# Altium PCB MolsonPCB.PcbDoc (part 7 of 9)
Units mil, origin at the board's own origin, x right, y up, seen from the top; angles counter-clockwise.
Board outline 8000 x 6000 mil, 14 copper layers (TopLayer (1 oz), InternalPlane1 (0.5 oz), InternalPlane2 (0.5 oz), MidLayer1 (0.5 oz), InternalPlane3 (0.5 oz), MidLayer2 (0.5 oz), InternalPlane4 (0.5 oz), InternalPlane5 (0.5 oz), MidLayer3 (0.5 oz), InternalPlane6 (0.5 oz), MidLayer4 (0.5 oz), InternalPlane7 (0.5 oz), InternalPlane8 (0.5 oz), BottomLayer (1 oz)), stack 86.2 mil thick; 657 components, 643 nets, 3094 pads, 1958 vias.
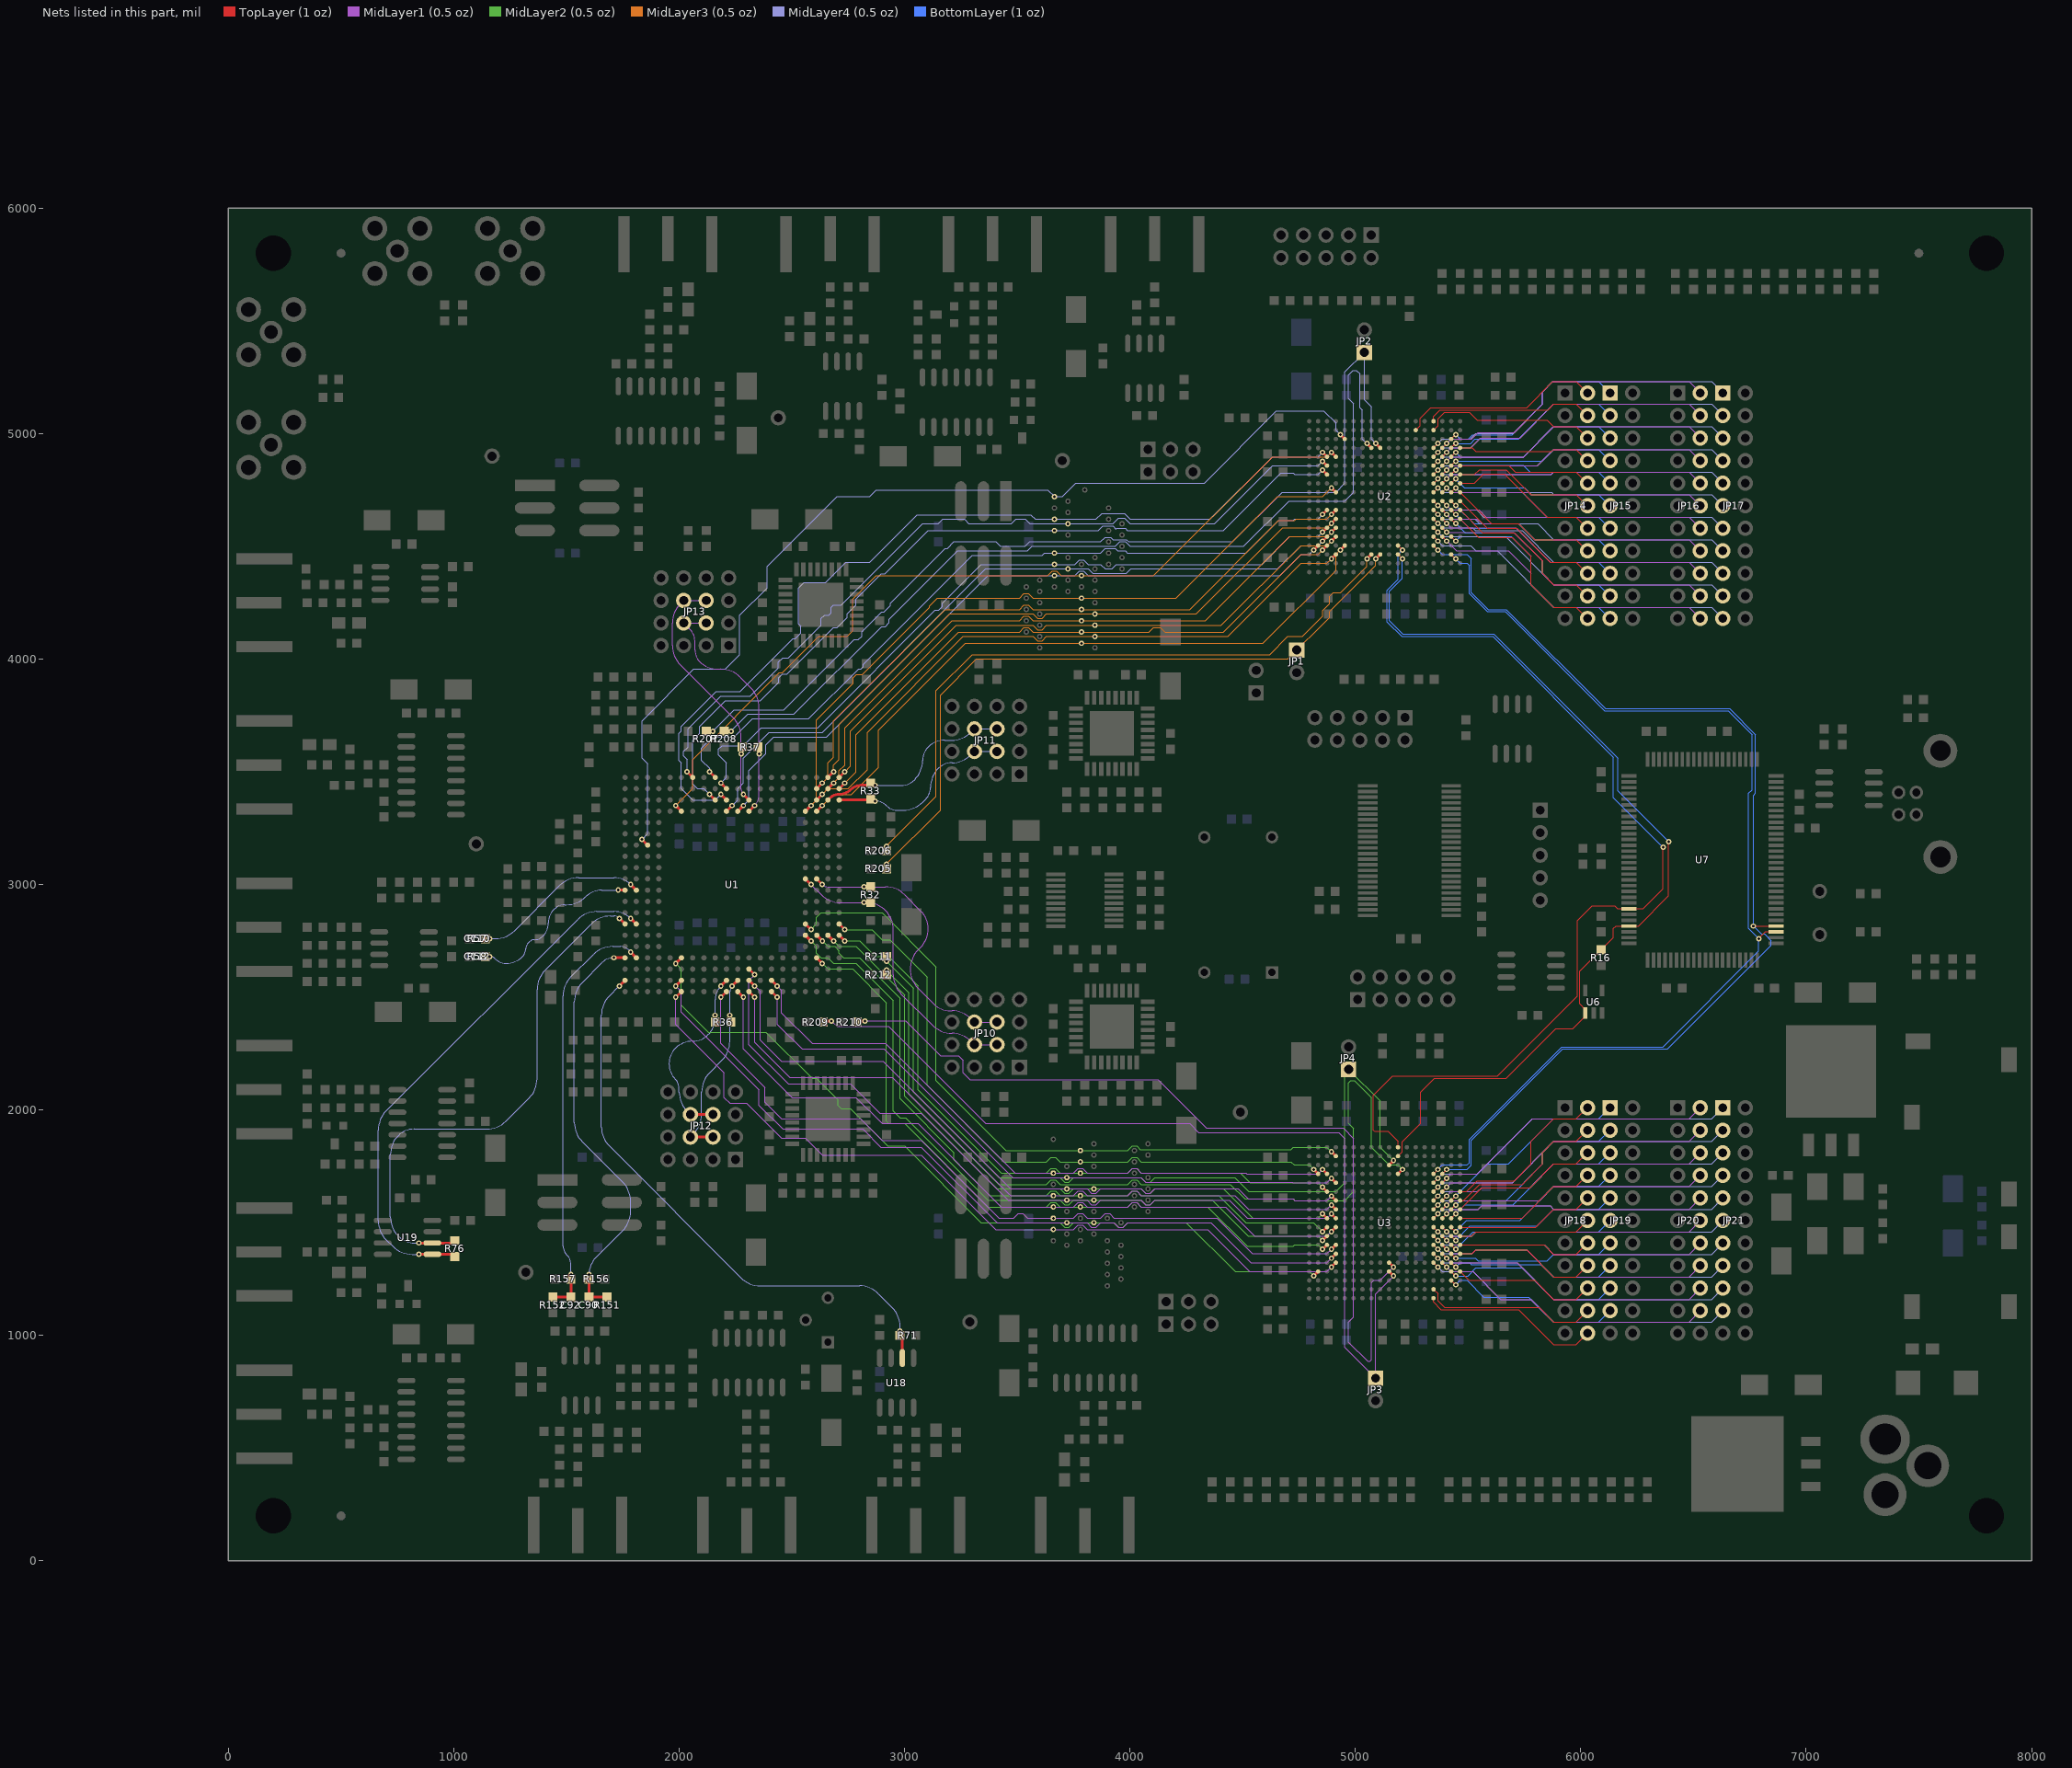
[diagram p19: the nets of this part, all layers, seen from the top]

## Via types
v1: diameter 24, hole 12, TopLayer (1 oz) to BottomLayer (1 oz), 1958 vias

## Nets (pads, with @x,y where several pads share a name; then routed paths per layer and width w, separated by ;. In a path a pad name is that pad's centre, name@x,y a point inside that pad or via, vN(x,y) a via of type N, cw(c..) or ccw(c..) an arc to the next point about the centre after c; other vN are vias at no path point) (continued)
OUTC1-: R71.1 U1.A2 U18.2 | length 2537.7
  TopLayer (1 oz) w12.34: v1(1735,2550) U1.A2@1760,2575 ; U18.2@2990,900 R71.1@2990,1000
  MidLayer4 (0.5 oz) w5.07: v1(1735,2550) 1690.36,2505.36 ccw(c1775.71,2420) 1655,2420 1655,1925 ccw(c1775.71,1925) 1690.36,1839.64 2274.64,1255.36 ccw(c2360,1340.71) 2360,1220 2800,1220 cw(c2800,1099.29) 2885.36,1184.64 2944.64,1125.36 cw(c2859.29,1040) 2980,1040 v1(2980,1020)
OUTC2+: C92.1 R152.1 R157.2 U1.B4 | length 1858
  TopLayer (1 oz) w12.34: R152.1@1440,1170 C92.1@1520,1170 R157.2@1520,1250 ; v1(1785,2700) U1.B4@1810,2675
  MidLayer4 (0.5 oz) w5.07: v1(1520,1270) 1520,1311.72 ccw(c1451.72,1311.72) 1500,1360 cw(c1536.21,1396.21) 1485,1396.21 1485,2505 cw(c1605.71,2505) 1520.36,2590.36 1619.64,2689.64 cw(c1705,2604.29) 1705,2725 1740,2725 cw(c1740,2676.72) 1774.14,2710.86 v1(1785,2700)
OUTC2-: C90.1 R151.2 R156.2 U1.A4 | length 1856.7
  TopLayer (1 oz) w12.34: R156.2@1600,1250 C90.1@1600,1170 R151.2@1680,1170 ; v1(1710,2675) U1.A4@1760,2675
  MidLayer4 (0.5 oz) w5.07: v1(1600,1270) cw(c1708.64,1270) 1631.82,1346.82 1749.64,1464.64 ccw(c1664.29,1550) 1785,1550 1785,1595 ccw(c1664.29,1595) 1749.64,1680.36 1570.36,1859.64 cw(c1655.71,1945) 1535,1945 1535,2480 cw(c1655.71,2480) 1570.36,2565.36 1658.79,2653.79 cw(c1710,2602.57) v1(1710,2675)
OUTD1+: R76.2 U1.B7 U19.1 | length 2405.1
  TopLayer (1 oz) w12.34: v1(845,1360) U19.1@905,1360 R76.2@1005,1360 ; v1(1785,2850) U1.B7@1810,2825
  MidLayer4 (0.5 oz) w5.07: v1(845,1360) 815,1360 cw(c815,1480.71) 729.64,1395.36 700.36,1424.64 cw(c785.71,1510) 665,1510 665,1910 cw(c785.71,1910) 700.36,1995.36 1549.64,2844.64 cw(c1635,2759.29) 1635,2880 1712.57,2880 cw(c1712.57,2777.57) v1(1785,2850)
OUTD1-: R76.1 U1.A7 U19.2 | length 2411.1
  TopLayer (1 oz) w12.34: v1(845,1410) U19.2@905,1410 R76.1@1005,1410 ; v1(1735,2850) U1.A7@1760,2825
  MidLayer4 (0.5 oz) w5.07: v1(845,1410) 826.92,1410 cw(c826.92,1511.21) 755.36,1439.64 754.36,1440.64 cw(c839.71,1526) 719,1526 719,1801 cw(c839.71,1801) 754.36,1886.36 cw(c823.51,1817.2) 823.51,1915 1146,1915 ccw(c1146,2035.71) 1231.36,1950.36 1334.64,2053.64 ccw(c1249.29,2139) 1370,2139 1370,2535 cw(c1490.71,2535) 1405.36,2620.36 1609.64,2824.64 cw(c1695,2739.29) 1695,2860 1710.86,2860 cw(c1710.86,2825.86) v1(1735,2850)
OUTD2+: C110.1 R57.2 U1.B10 | length 769.8
  TopLayer (1 oz) w12.34: v1(1785,3000) U1.B10@1810,2975
  MidLayer4 (0.5 oz) w5.07: v1(1160,2760) 1185,2760 ccw(c1185,2880.71) 1270.36,2795.36 1469.64,2994.64 cw(c1555,2909.29) 1555,3030 1712.57,3030 cw(c1712.57,2927.57) v1(1785,3000)
OUTD2-: C112.1 R58.2 U1.A10 | length 772.7
  TopLayer (1 oz) w12.34: v1(1730,2975) U1.A10@1760,2975
  MidLayer4 (0.5 oz) w5.07: v1(1160,2680) cw(c1160,2643.79) 1185.61,2669.39 ccw(c1232.43,2716.21) 1232.43,2650 ccw(c1232.43,2752.78) 1305.1,2680.1 ; 1305.13,2680.13 ccw(c1269.19,2716.04) 1320,2716.04 cw(c1353.69,2716.04) 1329.87,2739.87 1335.5,2745.5 cw(c1358.43,2722.57) 1358.43,2755 1358.48,2755 ccw(c1358.48,2806.94) 1395.21,2770.21 1395.25,2770.25 ccw(c1335.5,2830) 1420,2830 cw(c1504.5,2830) 1444.75,2889.75 cw(c1493.64,2840.86) 1493.64,2910 1500,2910 ccw(c1500,3030.71) 1585.36,2945.36 cw(c1656.92,2873.79) 1656.92,2975 v1(1730,2975)
PA7/*FLAGD/SLCS#: U2.L4 U3.H1 U7.74 | length 4486
  TopLayer (1 oz) w5: U3.H1@5189.06,1834.65 5189.06,1860.94 5145,1905 5085,1905 5080,1910 5080,2065 5165,2150 5630,2150 5985,2505 5985,2840 6050,2905 6150,2905 6162.52,2892.48 U7.74@6213.03,2892.48 6277.48,2892.48 6365,2980 v1(6365,3165) ; U2.L4@5189.06,4503.47 v1(5208.74,4483.78)
  BottomLayer (1 oz) w5: v1(5208.74,4483.78) 5189.06,4464.09 5189.06,4354.06 5140,4305 5140,4165 5205,4100 5610,4100 6145,3565 6145,3385 v1(6365,3165)
PRXCLKA: JP15.1 U2.U16 | length 879.2
  TopLayer (1 oz) w5: U2.U16@5425.27,4975.9 v1(5444.96,4995.59)
  BottomLayer (1 oz) w5: v1(5444.96,4995.59) 5464.65,4975.91 5500.91,4975.91 5520,4995 5695,4995 5830,5130 5830,5185 5875,5230 6080,5230 JP15.1@6130,5180
PRXCLKB: JP17.1 U2.R15 | length 1458
  TopLayer (1 oz) w5: U2.R15@5346.53,4936.53 v1(5366.22,4956.22)
  MidLayer4 (0.5 oz) w5: v1(5366.22,4956.22) 5385.91,4975.91 5510.91,4975.91 5535,5000 5700,5000 5830,5130 5830,5185 5875,5230 6580,5230 JP17.1@6630,5180
PRXCLKC: JP19.1 U3.B7 | length 875.2
  TopLayer (1 oz) w5: U3.B7@5425.27,1598.43 v1(5444.96,1618.11)
  BottomLayer (1 oz) w5: v1(5444.96,1618.11) 5586.85,1760 5680,1760 5880,1960 6080,1960 JP19.1@6130,2010
PRXCLKD: JP21.1 U3.D5 | length 1421.3
  TopLayer (1 oz) w5: U3.D5@5346.53,1677.16 v1(5366.22,1696.85)
  MidLayer4 (0.5 oz) w5: v1(5366.22,1696.85) 5385.91,1716.54 5541.54,1716.54 5785,1960 6580,1960 JP21.1@6630,2010
PRXDA0: JP15.3 U2.U15 | length 805.6
  TopLayer (1 oz) w5: U2.U15@5425.27,4936.53 v1(5444.96,4956.22)
  BottomLayer (1 oz) w5: v1(5444.96,4956.22) 5511.22,4956.22 5530,4975 5725,4975 5880,5130 6080,5130 JP15.3@6130,5080
PRXDA1: JP15.5 U2.U14 | length 798.6
  TopLayer (1 oz) w5: U2.U14@5425.27,4897.16 v1(5444.96,4916.85)
  BottomLayer (1 oz) w5: v1(5444.96,4916.85) 5466.81,4895 5745,4895 5880,5030 6080,5030 JP15.5@6130,4980
PRXDA2: JP15.7 U2.U13 | length 755.3
  TopLayer (1 oz) w5: U2.U13@5425.27,4857.8 v1(5444.96,4877.48)
  BottomLayer (1 oz) w5: v1(5444.96,4877.48) 5827.48,4877.48 5880,4930 6080,4930 JP15.7@6130,4880
PRXDA3: JP15.9 U2.U12 | length 755.1
  TopLayer (1 oz) w5: U2.U12@5425.27,4818.43 v1(5444.96,4838.11)
  BottomLayer (1 oz) w5: v1(5444.96,4838.11) 5466.85,4860 5745,4860 5775,4830 6080,4830 JP15.9@6130,4780
PRXDA4: JP15.11 U2.U11 | length 762.1
  TopLayer (1 oz) w5: U2.U11@5425.27,4779.06 v1(5444.96,4798.74)
  BottomLayer (1 oz) w5: v1(5444.96,4798.74) 5483.7,4760 5750,4760 5780,4730 6080,4730 JP15.11@6130,4680
PRXDA5: JP15.13 U2.U10 | length 787.2
  TopLayer (1 oz) w5: U2.U10@5425.27,4739.69 v1(5444.96,4759.37)
  BottomLayer (1 oz) w5: v1(5444.96,4759.37) 5464.33,4740 5740,4740 5850,4630 6080,4630 JP15.13@6130,4580
PRXDA6: JP15.15 U2.U9 | length 796
  TopLayer (1 oz) w5: U2.U9@5425.27,4700.31 v1(5444.96,4680.63)
  BottomLayer (1 oz) w5: v1(5444.96,4680.63) 5525.59,4600 5725,4600 5795,4530 6080,4530 JP15.15@6130,4480
PRXDA7: JP15.17 U2.U8 | length 821.1
  TopLayer (1 oz) w5: U2.U8@5425.27,4660.94 v1(5444.96,4641.26)
  BottomLayer (1 oz) w5: v1(5444.96,4641.26) 5506.22,4580 5715,4580 5865,4430 6080,4430 JP15.17@6130,4380
PRXDA8: JP15.19 U2.U7 | length 878.4
  TopLayer (1 oz) w5: U2.U7@5425.27,4621.57 v1(5444.96,4601.89)
  BottomLayer (1 oz) w5: v1(5444.96,4601.89) 5486.85,4560 5705,4560 5830,4435 5830,4380 5880,4330 6080,4330 JP15.19@6130,4280
PRXDA9: JP15.21 U2.U5 | length 944.5
  TopLayer (1 oz) w5: U2.U5@5425.27,4542.84 v1(5444.96,4523.15)
  BottomLayer (1 oz) w5: v1(5444.96,4523.15) 5464.65,4542.83 5692.17,4542.83 5780,4455 5780,4330 5880,4230 6080,4230 JP15.21@6130,4180
PRXDB0: JP17.3 U2.R14 | length 1400.6
  TopLayer (1 oz) w5: U2.R14@5346.53,4897.16 v1(5366.22,4916.85)
  MidLayer4 (0.5 oz) w5: v1(5366.22,4916.85) 5385.91,4936.54 5511.54,4936.54 5555,4980 5730,4980 5880,5130 6580,5130 JP17.3@6630,5080
PRXDB1: JP17.5 U2.R13 | length 1375.5
  TopLayer (1 oz) w5: U2.R13@5346.53,4857.8 v1(5366.22,4877.48)
  MidLayer4 (0.5 oz) w5: v1(5366.22,4877.48) 5385.91,4897.17 5747.17,4897.17 5880,5030 6580,5030 JP17.5@6630,4980
PRXDB2: JP17.7 U2.R12 | length 1350.4
  TopLayer (1 oz) w5: U2.R12@5346.53,4818.43 v1(5366.22,4838.11)
  MidLayer4 (0.5 oz) w5: v1(5366.22,4838.11) 5385.91,4857.8 5807.8,4857.8 5880,4930 6580,4930 JP17.7@6630,4880
PRXDB3: JP17.9 U2.R11 | length 1325.3
  TopLayer (1 oz) w5: U2.R11@5346.53,4779.06 v1(5366.22,4798.74)
  MidLayer4 (0.5 oz) w5: v1(5366.22,4798.74) 5385.91,4818.43 5868.43,4818.43 5880,4830 6580,4830 JP17.9@6630,4780
PRXDB4: JP17.11 U2.R10 | length 1324.5
  TopLayer (1 oz) w5: U2.R10@5346.53,4739.69 v1(5366.22,4759.37)
  MidLayer4 (0.5 oz) w5: v1(5366.22,4759.37) 5385.91,4739.69 5870.31,4739.69 5880,4730 6580,4730 JP17.11@6630,4680
PRXDB5: JP17.13 U2.R9 | length 1333.3
  TopLayer (1 oz) w5: U2.R9@5346.53,4700.31 v1(5366.22,4680.63)
  MidLayer4 (0.5 oz) w5: v1(5366.22,4680.63) 5385.91,4660.94 5539.06,4660.94 5570,4630 6580,4630 JP17.13@6630,4580
PRXDB6: JP17.15 U2.R8 | length 1358.4
  TopLayer (1 oz) w5: U2.R8@5346.53,4660.94 v1(5366.22,4641.26)
  MidLayer4 (0.5 oz) w5: v1(5366.22,4641.26) 5385.91,4621.57 5530,4621.57 5551.57,4600 5810,4600 5880,4530 6580,4530 JP17.15@6630,4480
PRXDB7: JP17.17 U2.R7 | length 1383.5
  TopLayer (1 oz) w5: U2.R7@5346.53,4621.57 v1(5366.22,4601.89)
  MidLayer4 (0.5 oz) w5: v1(5366.22,4601.89) 5385.91,4582.2 5520,4582.2 5532.2,4570 5740,4570 5880,4430 6580,4430 JP17.17@6630,4380
PRXDB8: JP17.19 U2.R6 | length 1408.6
  TopLayer (1 oz) w5: U2.R6@5346.53,4582.2 v1(5366.22,4562.52)
  MidLayer4 (0.5 oz) w5: v1(5366.22,4562.52) 5385.91,4542.83 5667.17,4542.83 5880,4330 6580,4330 JP17.19@6630,4280
PRXDB9: JP17.21 U2.R5 | length 1433.8
  TopLayer (1 oz) w5: U2.R5@5346.53,4542.84 v1(5366.22,4523.15)
  MidLayer4 (0.5 oz) w5: v1(5366.22,4523.15) 5385.91,4503.46 5511.54,4503.46 5535,4480 5630,4480 5880,4230 6580,4230 JP17.21@6630,4180
PRXDC0: JP19.3 U3.B8 | length 879.4
  TopLayer (1 oz) w5: U3.B8@5425.27,1559.06 v1(5444.96,1578.74)
  BottomLayer (1 oz) w5: v1(5444.96,1578.74) 5464.65,1598.43 5668.43,1598.43 5830,1760 5830,1810 5880,1860 6080,1860 JP19.3@6130,1910
PRXDC1: JP19.5 U3.B9 | length 825
  TopLayer (1 oz) w5: U3.B9@5425.27,1519.69 v1(5444.96,1539.37)
  BottomLayer (1 oz) w5: v1(5444.96,1539.37) 5485.59,1580 5700,1580 5880,1760 6080,1760 JP19.5@6130,1810
PRXDC2: JP19.7 U3.B10 | length 816.2
  TopLayer (1 oz) w5: U3.B10@5425.27,1480.31 v1(5444.96,1460.63)
  BottomLayer (1 oz) w5: v1(5444.96,1460.63) 5494.33,1510 5730,1510 5880,1660 6080,1660 JP19.7@6130,1710
PRXDC3: JP19.9 U3.B11 | length 791.1
  TopLayer (1 oz) w5: U3.B11@5425.27,1440.94 v1(5444.96,1421.26)
  BottomLayer (1 oz) w5: v1(5444.96,1421.26) 5508.7,1485 5805,1485 5880,1560 6080,1560 JP19.9@6130,1610
PRXDC4: JP19.11 U3.B12 | length 765.9
  TopLayer (1 oz) w5: U3.B12@5425.27,1401.57 v1(5444.96,1381.89)
  BottomLayer (1 oz) w5: v1(5444.96,1381.89) 5523.07,1460 6080,1460 JP19.11@6130,1510
PRXDC5: JP19.13 U3.B13 | length 751.2
  TopLayer (1 oz) w5: U3.B13@5425.27,1362.2 v1(5444.96,1342.52)
  BottomLayer (1 oz) w5: v1(5444.96,1342.52) 5532.48,1342.52 5545,1330 5850,1330 5880,1360 6080,1360 JP19.13@6130,1410
PRXDC6: JP19.15 U3.B14 | length 767.8
  TopLayer (1 oz) w5: U3.B14@5425.27,1322.84 v1(5444.96,1303.15)
  BottomLayer (1 oz) w5: v1(5444.96,1303.15) 5464.65,1322.84 5507.16,1322.84 5515,1315 5825,1315 5880,1260 6080,1260 JP19.15@6130,1310
PRXDC7: JP19.17 U3.B15 | length 806.6
  TopLayer (1 oz) w5: U3.B15@5425.27,1283.47 v1(5444.96,1263.78)
  BottomLayer (1 oz) w5: v1(5444.96,1263.78) 5498.78,1263.78 5535,1300 5740,1300 5880,1160 6080,1160 JP19.17@6130,1210
PRXDC8: JP19.19 U3.B16 | length 818
  TopLayer (1 oz) w5: U3.B16@5425.27,1244.1 v1(5444.96,1224.41)
  BottomLayer (1 oz) w5: v1(5444.96,1224.41) 5464.65,1244.1 5495.9,1244.1 5570,1170 5770,1170 5880,1060 6080,1060 JP19.19@6130,1110
PRXDC9: JP19.21 U3.C16 | length 882.5
  TopLayer (1 oz) w5: U3.C16@5385.9,1244.1 v1(5405.59,1224.41)
  BottomLayer (1 oz) w5: v1(5405.59,1224.41) 5425.28,1204.72 5500.28,1204.72 5595,1110 5730,1110 5880,960 6080,960 JP19.21@6130,1010
PRXDC9: 
PRXDD0: JP21.3 U3.D6 | length 1396.2
  TopLayer (1 oz) w5: U3.D6@5346.53,1637.8 v1(5366.22,1657.48)
  MidLayer4 (0.5 oz) w5: v1(5366.22,1657.48) 5385.91,1677.17 5697.17,1677.17 5880,1860 6580,1860 JP21.3@6630,1910
PRXDD1: JP21.5 U3.D7 | length 1371.1
  TopLayer (1 oz) w5: U3.D7@5346.53,1598.43 v1(5366.22,1618.11)
  MidLayer4 (0.5 oz) w5: v1(5366.22,1618.11) 5385.91,1637.8 5542.8,1637.8 5560,1655 5775,1655 5880,1760 6580,1760 JP21.5@6630,1810
PRXDD2: JP21.7 U3.D8 | length 1346
  TopLayer (1 oz) w5: U3.D8@5346.53,1559.06 v1(5366.22,1578.74)
  MidLayer4 (0.5 oz) w5: v1(5366.22,1578.74) 5385.91,1598.43 5818.43,1598.43 5880,1660 6580,1660 JP21.7@6630,1710
PRXDD3: JP21.9 U3.D9 | length 1333.3
  TopLayer (1 oz) w5: U3.D9@5346.53,1519.69 v1(5366.22,1539.37)
  MidLayer4 (0.5 oz) w5: v1(5366.22,1539.37) 5385.91,1559.06 5544.06,1559.06 5560,1575 5865,1575 5880,1560 6580,1560 JP21.9@6630,1610
PRXDD4: JP21.11 U3.D10 | length 1328.4
  TopLayer (1 oz) w5: U3.D10@5346.53,1480.31 v1(5366.22,1460.63)
  MidLayer4 (0.5 oz) w5: v1(5366.22,1460.63) 5385.91,1440.94 5515.94,1440.94 5535,1460 6580,1460 JP21.11@6630,1510
PRXDD5: JP21.13 U3.D11 | length 1337.7
  TopLayer (1 oz) w5: U3.D11@5346.53,1440.94 v1(5366.22,1421.26)
  MidLayer4 (0.5 oz) w5: v1(5366.22,1421.26) 5385.91,1401.57 5838.43,1401.57 5880,1360 6580,1360 JP21.13@6630,1410
PRXDD6: JP21.15 U3.D12 | length 1377.6
  TopLayer (1 oz) w5: U3.D12@5346.53,1401.57 v1(5366.22,1381.89)
  MidLayer4 (0.5 oz) w5: v1(5366.22,1381.89) 5385.91,1362.2 5517.2,1362.2 5535,1380 5760,1380 5880,1260 6580,1260 JP21.15@6630,1310
PRXDD7: JP21.17 U3.D13 | length 1387.9
  TopLayer (1 oz) w5: U3.D13@5346.53,1362.2 v1(5366.22,1342.52)
  MidLayer4 (0.5 oz) w5: v1(5366.22,1342.52) 5385.91,1322.83 5717.17,1322.83 5880,1160 6580,1160 JP21.17@6630,1210
PRXDD8: JP21.19 U3.D14 | length 1413
  TopLayer (1 oz) w5: U3.D14@5346.53,1322.84 v1(5366.22,1303.15)
  MidLayer4 (0.5 oz) w5: v1(5366.22,1303.15) 5385.91,1283.46 5521.54,1283.46 5645,1160 5780,1160 5880,1060 6580,1060 JP21.19@6630,1110
PRXDD9: JP21.21 U3.D15 | length 1438.2
  TopLayer (1 oz) w5: U3.D15@5346.53,1283.47 v1(5366.22,1263.78)
  MidLayer4 (0.5 oz) w5: v1(5366.22,1263.78) 5385.91,1244.09 5495.91,1244.09 5630,1110 5730,1110 5880,960 6580,960 JP21.21@6630,1010
PRXDD9: 
PTXCLKA: JP14.2 U2.N17 | length 890.9
  TopLayer (1 oz) w5: U2.N17@5267.8,5015.27 5287.48,5034.96 5287.48,5067.48 5335,5115 5760,5115 5875,5230 5980,5230 JP14.2@6030,5180
PTXCLKB: JP16.2 U2.T15 | length 1318.6
  TopLayer (1 oz) w5: U2.T15@5385.9,4936.53 v1(5405.59,4956.22)
  MidLayer1 (0.5 oz) w5: v1(5405.59,4956.22) 5425.28,4975.91 5515.91,4975.91 5545,5005 5705,5005 5830,5130 5830,5185 5875,5230 6480,5230 JP16.2@6530,5180
PTXCLKC: JP18.2 U3.A6 | length 778.1
  TopLayer (1 oz) w5: U3.A6@5464.65,1637.8 5492.8,1637.8 5540,1685 5705,1685 5780,1760 5780,1860 5880,1960 5980,1960 JP18.2@6030,2010
PTXCLKD: JP20.2 U3.C5 | length 1282
  TopLayer (1 oz) w5: U3.C5@5385.9,1677.16 v1(5405.59,1696.85)
  MidLayer1 (0.5 oz) w5: v1(5405.59,1696.85) 5425.28,1716.54 5541.54,1716.54 5785,1960 6480,1960 JP20.2@6530,2010
PTXDA0: JP14.4 U2.R18 | length 748.2
  TopLayer (1 oz) w5: U2.R18@5346.53,5054.65 5346.53,5076.53 5375,5105 5855,5105 5880,5130 5980,5130 JP14.4@6030,5080
PTXDA1: JP14.6 U2.R17 | length 782.4
  TopLayer (1 oz) w5: U2.R17@5346.53,5015.27 5366.22,5034.96 5366.22,5066.22 5395,5095 5505,5095 5540,5060 5850,5060 5880,5030 5980,5030 JP14.6@6030,4980
PTXDA2: JP14.8 U2.V15 | length 597.1
  TopLayer (1 oz) w5: U2.V15@5464.65,4936.53 5518.47,4936.53 5535,4920 5870,4920 5880,4930 5980,4930 JP14.8@6030,4880
PTXDA3: JP14.10 U2.V13 | length 597.6
  TopLayer (1 oz) w5: U2.V13@5464.65,4857.8 5682.2,4857.8 5710,4830 5980,4830 JP14.10@6030,4780
PTXDA4: JP14.12 U2.V12 | length 640.6
  TopLayer (1 oz) w5: U2.V12@5464.65,4818.43 5528.43,4818.43 5550,4840 5670,4840 5780,4730 5980,4730 JP14.12@6030,4680
PTXDA5: JP14.14 U2.V11 | length 681.7
  TopLayer (1 oz) w5: U2.V11@5464.65,4779.06 5529.06,4779.06 5570,4820 5660,4820 5850,4630 5980,4630 JP14.14@6030,4580
PTXDA6: JP14.16 U2.V10 | length 672.9
  TopLayer (1 oz) w5: U2.V10@5464.65,4739.69 5604.33,4600 5725,4600 5795,4530 5980,4530 JP14.16@6030,4480
PTXDA7: JP14.18 U2.V9 | length 698
  TopLayer (1 oz) w5: U2.V9@5464.65,4700.31 5584.96,4580 5715,4580 5865,4430 5980,4430 JP14.18@6030,4380
PTXDA8: JP14.20 U2.V8 | length 755.4
  TopLayer (1 oz) w5: U2.V8@5464.65,4660.94 5565.59,4560 5705,4560 5830,4435 5830,4380 5880,4330 5980,4330 JP14.20@6030,4280
PTXDA9: JP14.22 U2.V7 | length 821.5
  TopLayer (1 oz) w5: U2.V7@5464.65,4621.57 5546.22,4540 5695,4540 5780,4455 5780,4330 5880,4230 5980,4230 JP14.22@6030,4180
PTXDB0: JP16.4 U2.T14 | length 1261.2
  TopLayer (1 oz) w5: U2.T14@5385.9,4897.16 v1(5405.59,4916.85)
  MidLayer1 (0.5 oz) w5: v1(5405.59,4916.85) 5425.28,4936.54 5511.54,4936.54 5555,4980 5730,4980 5880,5130 6480,5130 JP16.4@6530,5080
PTXDB1: JP16.6 U2.T13 | length 1236.1
  TopLayer (1 oz) w5: U2.T13@5385.9,4857.8 v1(5405.59,4877.48)
  MidLayer1 (0.5 oz) w5: v1(5405.59,4877.48) 5425.28,4897.17 5747.17,4897.17 5880,5030 6480,5030 JP16.6@6530,4980
PTXDB2: JP16.8 U2.T12 | length 1211
  TopLayer (1 oz) w5: U2.T12@5385.9,4818.43 v1(5405.59,4838.11)
  MidLayer1 (0.5 oz) w5: v1(5405.59,4838.11) 5425.28,4857.8 5807.8,4857.8 5880,4930 6480,4930 JP16.8@6530,4880
PTXDB3: JP16.10 U2.T11 | length 1185.9
  TopLayer (1 oz) w5: U2.T11@5385.9,4779.06 v1(5405.59,4798.74)
  MidLayer1 (0.5 oz) w5: v1(5405.59,4798.74) 5425.28,4818.43 5868.43,4818.43 5880,4830 6480,4830 JP16.10@6530,4780
PTXDB4: JP16.12 U2.T10 | length 1185.1
  TopLayer (1 oz) w5: U2.T10@5385.9,4739.69 v1(5405.59,4759.37)
  MidLayer1 (0.5 oz) w5: v1(5405.59,4759.37) 5425.28,4739.69 5770.31,4739.69 5780,4730 6480,4730 JP16.12@6530,4680
PTXDB5: JP16.14 U2.T9 | length 1193.9
  TopLayer (1 oz) w5: U2.T9@5385.9,4700.31 v1(5405.59,4680.63)
  MidLayer1 (0.5 oz) w5: v1(5405.59,4680.63) 5425.28,4660.94 5549.06,4660.94 5580,4630 6480,4630 JP16.14@6530,4580
PTXDB6: JP16.16 U2.T8 | length 1219
  TopLayer (1 oz) w5: U2.T8@5385.9,4660.94 v1(5405.59,4641.26)
  MidLayer1 (0.5 oz) w5: v1(5405.59,4641.26) 5425.28,4621.57 5538.43,4621.57 5560,4600 5725,4600 5795,4530 6480,4530 JP16.16@6530,4480
PTXDB7: JP16.18 U2.T7 | length 1244.2
  TopLayer (1 oz) w5: U2.T7@5385.9,4621.57 v1(5405.59,4601.89)
  MidLayer1 (0.5 oz) w5: v1(5405.59,4601.89) 5425.28,4582.2 5712.8,4582.2 5865,4430 6480,4430 JP16.18@6530,4380
PTXDB8: JP16.20 U2.T6 | length 1301.5
  TopLayer (1 oz) w5: U2.T6@5385.9,4582.2 v1(5405.59,4562.52)
  MidLayer1 (0.5 oz) w5: v1(5405.59,4562.52) 5702.48,4562.52 5830,4435 5830,4380 5880,4330 6480,4330 JP16.20@6530,4280
PTXDB9: JP16.22 U2.T5 | length 1323.7
  TopLayer (1 oz) w5: U2.T5@5385.9,4542.84 v1(5405.59,4523.15)
  MidLayer1 (0.5 oz) w5: v1(5405.59,4523.15) 5448.74,4480 5680,4480 5780,4380 5780,4330 5880,4230 6480,4230 JP16.22@6530,4180
PTXDC0: JP18.4 U3.A7 | length 723.7
  TopLayer (1 oz) w5: U3.A7@5464.65,1598.43 5478.43,1598.43 5550,1670 5740,1670 5830,1760 5830,1810 5880,1860 5980,1860 JP18.4@6030,1910
PTXDC1: JP18.6 U3.A8 | length 669.3
  TopLayer (1 oz) w5: U3.A8@5464.65,1559.06 5560.59,1655 5775,1655 5880,1760 5980,1760 JP18.6@6030,1810
PTXDC2: JP18.8 U3.A9 | length 644.2
  TopLayer (1 oz) w5: U3.A9@5464.65,1519.69 5739.69,1519.69 5880,1660 5980,1660 JP18.8@6030,1710
PTXDC3: JP18.10 U3.A10 | length 619.1
  TopLayer (1 oz) w5: U3.A10@5464.65,1480.31 5800.31,1480.31 5880,1560 5980,1560 JP18.10@6030,1610
PTXDC4: JP18.12 U3.A11 | length 594
  TopLayer (1 oz) w5: U3.A11@5464.65,1440.94 5515.94,1440.94 5535,1460 5980,1460 JP18.12@6030,1510
PTXDC5: JP18.14 U3.A12 | length 603.3
  TopLayer (1 oz) w5: U3.A12@5464.65,1401.57 5838.43,1401.57 5880,1360 5980,1360 JP18.14@6030,1410
PTXDC6: JP18.16 U3.A13 | length 643.1
  TopLayer (1 oz) w5: U3.A13@5464.65,1362.2 5517.2,1362.2 5535,1380 5760,1380 5880,1260 5980,1260 JP18.16@6030,1310
PTXDC7: JP18.18 U3.A15 | length 637.2
  TopLayer (1 oz) w5: U3.A15@5464.65,1283.47 5503.11,1245 5795,1245 5880,1160 5980,1160 JP18.18@6030,1210
PTXDC8: 
PTXDC8: JP18.20 U3.D17 | length 782.4
  TopLayer (1 oz) w5: U3.D17@5346.53,1204.73 5366.22,1185.04 5366.22,1153.78 5395,1125 5815,1125 5880,1060 5980,1060 JP18.20@6030,1110
PTXDC9: 
PTXDC9: JP18.22 U3.D18 | length 799.1
  TopLayer (1 oz) w5: U3.D18@5346.53,1165.35 5346.53,1148.47 5380,1115 5725,1115 5880,960 5980,960 JP18.22@6030,1010
PTXDD0: JP20.4 U3.C6 | length 1256.8
  TopLayer (1 oz) w5: U3.C6@5385.9,1637.8 v1(5405.59,1657.48)
  MidLayer1 (0.5 oz) w5: v1(5405.59,1657.48) 5425.28,1677.17 5697.17,1677.17 5880,1860 6480,1860 JP20.4@6530,1910
PTXDD1: JP20.6 U3.C7 | length 1231.7
  TopLayer (1 oz) w5: U3.C7@5385.9,1598.43 v1(5405.59,1618.11)
  MidLayer1 (0.5 oz) w5: v1(5405.59,1618.11) 5425.28,1637.8 5542.8,1637.8 5560,1655 5775,1655 5880,1760 6480,1760 JP20.6@6530,1810
PTXDD2: JP20.8 U3.C8 | length 1206.6
  TopLayer (1 oz) w5: U3.C8@5385.9,1559.06 v1(5405.59,1578.74)
  MidLayer1 (0.5 oz) w5: v1(5405.59,1578.74) 5425.28,1598.43 5818.43,1598.43 5880,1660 6480,1660 JP20.8@6530,1710
PTXDD3: JP20.10 U3.C9 | length 1193.9
  TopLayer (1 oz) w5: U3.C9@5385.9,1519.69 v1(5405.59,1539.37)
  MidLayer1 (0.5 oz) w5: v1(5405.59,1539.37) 5425.28,1559.06 5544.06,1559.06 5560,1575 5865,1575 5880,1560 6480,1560 JP20.10@6530,1610
PTXDD4: JP20.12 U3.C10 | length 1189
  TopLayer (1 oz) w5: U3.C10@5385.9,1480.31 v1(5405.59,1460.63)
  MidLayer1 (0.5 oz) w5: v1(5405.59,1460.63) 5425.28,1440.94 5515.94,1440.94 5535,1460 6480,1460 JP20.12@6530,1510
PTXDD5: JP20.14 U3.C11 | length 1198.3
  TopLayer (1 oz) w5: U3.C11@5385.9,1440.94 v1(5405.59,1421.26)
  MidLayer1 (0.5 oz) w5: v1(5405.59,1421.26) 5425.28,1401.57 5838.43,1401.57 5880,1360 6480,1360 JP20.14@6530,1410
PTXDD6: JP20.16 U3.C12 | length 1238.2
  TopLayer (1 oz) w5: U3.C12@5385.9,1401.57 v1(5405.59,1381.89)
  MidLayer1 (0.5 oz) w5: v1(5405.59,1381.89) 5425.28,1362.2 5517.2,1362.2 5535,1380 5760,1380 5880,1260 6480,1260 JP20.16@6530,1310
PTXDD7: JP20.18 U3.C13 | length 1248.6
  TopLayer (1 oz) w5: U3.C13@5385.9,1362.2 v1(5405.59,1342.52)
  MidLayer1 (0.5 oz) w5: v1(5405.59,1342.52) 5425.28,1322.83 5717.17,1322.83 5880,1160 6480,1160 JP20.18@6530,1210
PTXDD8: JP20.20 U3.C14 | length 1273.7
  TopLayer (1 oz) w5: U3.C14@5385.9,1322.84 v1(5405.59,1303.15)
  MidLayer1 (0.5 oz) w5: v1(5405.59,1303.15) 5425.28,1283.46 5521.54,1283.46 5645,1160 5780,1160 5880,1060 6480,1060 JP20.20@6530,1110
PTXDD9: JP20.22 U3.C15 | length 1298.8
  TopLayer (1 oz) w5: U3.C15@5385.9,1283.47 v1(5405.59,1263.78)
  MidLayer1 (0.5 oz) w5: v1(5405.59,1263.78) 5425.28,1244.09 5495.91,1244.09 5630,1110 5730,1110 5880,960 6480,960 JP20.22@6530,1010
PTXDD9: 
RCLKENA: pad.TVIA@3785,4370 U1.F17 U2.D14 | length 3795.7
  TopLayer (1 oz) w12: v1(1985,3350) U1.F17@2010,3325 ; v1(4893.78,4916.85) U2.D14@4913.47,4897.16
  MidLayer3 (0.5 oz) w5: v1(1985,3350) 2060,3425 2060,3555 2444.07,3939.07 2459.07,3939.07 2620,4100 2745,4100 2770,4125 2770,4265 2875,4370 3635,4370 3655,4390 3675,4390 3695,4370 4105,4370 4632.17,4897.17 4874.1,4897.17 v1(4893.78,4916.85)
RCLKENB: pad.TVIA@3665,4720 U1.C14 U2.E16 | length 4521.2
  TopLayer (1 oz) w12: v1(1835,3200) U1.C14@1860,3175 ; v1(4933.15,4995.59) U2.E16@4952.84,4975.9
  MidLayer4 (0.5 oz) w5: v1(1835,3200) 1860,3225 1860,3535 1835,3560 1835,3725 2065,3955 2205,3955 2268.68,4018.68 2268.68,4193.68 2390.07,4315.07 2390.07,4410.07 2700,4720 2845,4720 2875,4750 3635,4750 pad.TVIA@3665,4720 3700,4720 3760,4780 4330,4780 4650,5100 4860,5100 4913.47,5046.53 4913.47,5015.27 v1(4933.15,4995.59)
RCLKENC: pad.TVIA@3720,1600 U1.M3 U3.R9 | length 3327.7
  TopLayer (1 oz) w12: U1.M3@2310,2625 v1(2335,2600) ; v1(4893.78,1539.37) U3.R9@4913.47,1519.69
  MidLayer1 (0.5 oz) w5: v1(2335,2600) 2310,2575 2310,2290 2485,2115 2760,2115 2890,1985 3075,1985 3460,1600 3810,1600 3830,1580 3850,1580 3870,1600 4050,1600 4070,1580 4090,1580 4110,1600 4440,1600 4520.31,1519.69 4874.09,1519.69 v1(4893.78,1539.37)
RCLKEND: pad.TVIA@3840,1500 U1.F4 U3.U15 | length 3608.9
  TopLayer (1 oz) w12: v1(1985,2650) U1.F4@2010,2675 ; v1(4815.04,1263.78) U3.U15@4834.73,1283.47
  MidLayer2 (0.5 oz) w5: v1(1985,2650) 2010,2625 2010,2465 2130,2345 2385,2345 2590,2140 2610,2140 2705,2045 2705,2020 2720,2005 2760,2005 2925,1840 3000,1840 3340,1500 3690,1500 3710,1480 3730,1480 3750,1500 3930,1500 3950,1480 3970,1480 3990,1500 4250,1500 4466.54,1283.46 4795.35,1283.46 v1(4815.04,1263.78)
RDY0: U2.R4 U3.C4 U7.4 | length 4887.9
  TopLayer (1 oz) w5: U2.R4@5346.53,4503.47 v1(5366.22,4483.78) ; U3.C4@5385.9,1716.53 v1(5405.59,1736.22) ; v1(6765.71,2815.71) U7.4@6866.97,2815.71
  BottomLayer (1 oz) w5: v1(5366.22,4483.78) 5385.91,4464.09 5495.91,4464.09 5515,4445 5515,4295 5590,4220 5670,4220 6110,3780 6660,3780 6775,3665 6775,3405 6765.71,3395.71 v1(6765.71,2815.71) 6801.42,2780 6815,2780 6845,2750 6845,2730 6385,2270 5920,2270 5515,1865 5515,1755 5496.22,1736.22 v1(5405.59,1736.22)
RDY1: U2.U3 U3.D4 U7.3 | length 4727.7
  TopLayer (1 oz) w5: U3.D4@5346.53,1716.53 v1(5366.22,1736.22) ; U2.U3@5425.27,4464.1 v1(5444.96,4444.41) ; v1(6790,2760) 6820.12,2790.12 U7.3@6866.97,2790.12
  BottomLayer (1 oz) w5: v1(5366.22,1736.22) 5385.91,1755.91 5495.91,1755.91 5505,1765 5505,1870 5915,2280 6365,2280 6790,2705 v1(6790,2760) 6745,2805 6745,3405 6760,3420 6760,3665 6655,3770 6105,3770 5665,4210 5585,4210 5505,4290 5505,4415 5495.28,4424.72 5464.65,4424.72 v1(5444.96,4444.41)
refclk: 
REFCLKA+: JP11.10 JP11.11 R33.1 U1.W18 | length 879.7
  TopLayer (1 oz) w12.34: U1.W18@2660,3375 2667.32,3382.32 cw(c2710,3339.64) 2710,3400 ccw(c2710,3472.43) 2761.21,3421.21 cw(c2806.57,3375.86) 2806.57,3440 R33.1@2850,3440
  MidLayer4 (0.5 oz) w5.07: v1(2870,3440) 2984.79,3440 ccw(c2984.79,3525) 3044.9,3464.9 ccw(c2960.15,3549.64) 3080,3549.64 cw(c3165.36,3549.64) 3105,3610 cw(c3177.43,3537.57) 3177.43,3640 3210,3640 ccw(c3210,3760.71) 3295.36,3675.36 JP11.11@3310,3690 JP11.10@3410,3690
REFCLKA-: JP11.6 JP11.7 R33.2 U1.Y18 | length 822.9
  TopLayer (1 oz) w12.34: U1.Y18@2710,3375 R33.2@2850,3375
  MidLayer4 (0.5 oz) w5.07: v1(2870,3370) cw(c2870,3297.57) 2921.21,3348.79 ccw(c2966.57,3394.14) 2966.57,3330 2995,3330 ccw(c2995,3450.71) 3080.36,3365.36 3093.68,3378.68 ccw(c3042.22,3430.15) 3115,3430.15 cw(c3235.36,3430.15) 3150.25,3515.25 cw(c3210,3455.5) 3210,3540 ccw(c3210,3660.71) 3295.36,3575.36 JP11.7@3310,3590 JP11.6@3410,3590
REFCLKB+: JP13.6 JP13.7 R37.2 U1.M17 | length 1162.4
  TopLayer (1 oz) w12.34: U1.M17@2310,3325 v1(2335,3350) ; v1(2355,3580) R37.2@2355,3610
  MidLayer1 (0.5 oz) w5.07: JP13.6@2120,4160 JP13.7@2020,4160 2048.79,4131.21 cw(c1997.57,4080) 2070,4080 2070,4040 ccw(c2142.43,4040) 2091.21,3988.79 ccw(c2172.78,4070.36) 2172.78,3955 2185,3955 cw(c2185,3834.29) 2270.36,3919.64 2319.64,3870.36 cw(c2234.29,3785) 2355,3785 v1(2355,3580) 2355,3398.28 cw(c2286.72,3398.28) v1(2335,3350) ; v1(2335,3350) cw(c2286.72,3398.28) v1(2335,3350) ccw(c2310.86,3374.14) v1(2335,3350)
REFCLKB-: JP13.10 JP13.11 R37.1 U1.M18 | length 1159.5
  TopLayer (1 oz) w12.34: v1(2275,3580) R37.1@2275,3610 ; v1(2285,3400) U1.M18@2310,3375
  MidLayer1 (0.5 oz) w5.07: JP13.10@2120,4260 JP13.11@2020,4260 2005.36,4245.36 ccw(c2090.71,4160) 1970,4160 1970,4060 ccw(c2090.71,4060) 2005.36,3974.64 2239.64,3740.36 cw(c2154.29,3655) 2275,3655 v1(2275,3580) 2275,3424.14 ccw(c2309.14,3424.14) v1(2285,3400)
REFCLKC+: JP12.6 JP12.7 R36.1 U1.L2 | length 894.9
  TopLayer (1 oz) w12.34: JP12.7@2050,1880 JP12.6@2150,1880 ; R36.1@2225,2390 v1(2225,2420) ; v1(2235,2550) U1.L2@2260,2575
  MidLayer4 (0.5 oz) w5.07: JP12.7@2050,1880 2064.64,1894.64 ccw(c1979.29,1980) 2100,1980 2100,2080 cw(c2220.71,2080) 2135.36,2165.36 2189.64,2219.64 ccw(c2104.29,2305) 2225,2305 v1(2225,2420) 2225,2525.86 cw(c2259.14,2525.86) v1(2235,2550)
REFCLKC-: JP12.10 JP12.11 R36.2 U1.K2 | length 886.7
  TopLayer (1 oz) w12.34: JP12.11@2050,1980 JP12.10@2150,1980 ; R36.2@2160,2390 v1(2160,2420) ; v1(2185,2550) U1.K2@2210,2575
  MidLayer4 (0.5 oz) w5.07: JP12.11@2050,1980 2035.36,1994.64 cw(c2120.71,2080) 2000,2080 2000,2096.65 ccw(c1943.64,2096.65) 1983.49,2136.51 cw(c2052.28,2205.29) 1955,2205.29 cw(c2050.86,2205.29) 1983.08,2273.08 cw(c2060.15,2196.01) 2060.15,2305 ccw(c2060.15,2401.21) 2128.17,2333.17 ; 2128.18,2333.18 ccw(c2051.36,2410) 2160,2410 v1(2160,2420) 2160,2489.64 cw(c2245.36,2489.64) v1(2185,2550)
REFCLKD+: JP10.10 JP10.11 R32.2 U1.V11 | length 1330.8
  TopLayer (1 oz) w12.34: U1.V11@2610,3025 v1(2635,3000) ; v1(2820,2990) R32.2@2850,2990
  MidLayer1 (0.5 oz) w5.07: v1(2635,3000) ccw(c2659.14,3024.14) 2659.14,2990 v1(2820,2990) 2915,2990 cw(c2915,2869.29) 3000.36,2954.64 3073.18,2881.82 cw(c2996.36,2805) 3105,2805 cw(c2984.29,2805) 3069.64,2719.64 3060.36,2710.36 ccw(c3145.71,2625) 3030.51,2661.04 ccw(c3145.71,2625) 3025,2625 ccw(c3145.71,2625) 3060.36,2539.64 3130.36,2469.64 ccw(c3201.92,2541.21) 3201.92,2440 3210,2440 cw(c3210,2319.29) 3295.36,2404.64 JP10.11@3310,2390 JP10.10@3410,2390
REFCLKD-: JP10.6 JP10.7 R32.1 U1.U11 | length 1329.1
  TopLayer (1 oz) w12.34: U1.U11@2560,3025 v1(2585,3000) ; v1(2820,2920) R32.1@2850,2920
  MidLayer1 (0.5 oz) w5.07: v1(2585,3000) 2629.64,2955.36 ccw(c2715,3040.71) 2715,2920 v1(2820,2920) 2830,2920 cw(c2830,2799.29) 2915.36,2884.64 cw(c2831.72,2801.01) 2950,2801.01 2950,2600 ccw(c3070.71,2600) 2985.36,2514.64 3124.64,2375.36 ccw(c3210,2460.71) 3210,2340 cw(c3210,2219.29) 3295.36,2304.64 JP10.7@3310,2290 JP10.6@3410,2290
RESET#: R16.1 U2.L3 U3.H2 U6.1 U7.77 | length 4230.3
  TopLayer (1 oz) w5: U3.H2@5189.06,1795.27 5208.74,1814.96 5208.74,1858.74 5290,1940 5290,2080 5350,2140 5670,2140 5890,2360 5965,2360 U6.1@6020,2415 ; U2.L3@5189.06,4464.1 v1(5208.74,4444.41) ; U6.1@6020,2445 5995,2470 5995,2615 6145,2765 6145,2805 6155.71,2815.71 U7.77@6213.03,2815.71 6255.71,2815.71 6390,2950 v1(6390,3190)
  BottomLayer (1 oz) w5: v1(5208.74,4444.41) 5208.74,4358.74 5150,4300 5150,4170 5210,4110 5615,4110 6165,3560 6165,3415 v1(6390,3190)
RXCLKA+: JP1.1 R205.2 U2.J3 | length 3089.7
  TopLayer (1 oz) w12: v1(5090.63,4444.41) U2.J3@5110.31,4464.1
  MidLayer3 (0.5 oz) w5: v1(2920,3090) 3160,3330 3160,3840 3320,4000 4700,4000 4885,4185 4885,4210 5090.63,4415.63 v1(5090.63,4444.41)
RXCLKA-: R206.2 U2.H3 | length 3015.8
  TopLayer (1 oz) w12: v1(5051.26,4444.41) U2.H3@5070.94,4464.1
  MidLayer3 (0.5 oz) w5: v1(2920,3170) 3140,3390 3140,3860 3300,4020 4620,4020 4700,4100 4765,4100 4855,4190 4855,4215 4885,4245 4885,4278.15 4901.85,4295 4935,4295 5051.26,4411.26 v1(5051.26,4444.41)
RXCLKB+: JP2.1 R207.2 U2.J15 | length 4408.4
  TopLayer (1 oz) w12: R207.2@2120,3680 v1(2150,3680) ; v1(5090.63,4956.22) U2.J15@5110.31,4936.53
  MidLayer4 (0.5 oz) w5: v1(2150,3680) 2245,3775 2465,3775 2775.61,4085.61 2795.61,4085.61 2811.64,4101.64 2811.64,4121.64 2899.57,4209.57 2909.57,4209.57 2936.65,4236.65 2936.65,4246.65 3180.56,4490.56 3190.56,4490.56 3220,4520 3405,4520 3425,4500 3535,4500 3555,4520 3870,4520 3890,4540 3915,4540 3925,4530 3984.14,4530 3994.14,4520 4455,4520 4674.69,4739.69 4913.46,4739.69 4952.83,4779.06 4952.83,5272.83 JP2.1@5040,5360 5040,5150 5070.94,5119.06 5070.94,4975.9 v1(5090.63,4956.22)
RXCLKB-: R208.2 U2.H15 | length 4200.1
  TopLayer (1 oz) w12: R208.2@2200,3680 v1(2230,3680) ; v1(5051.26,4956.22) U2.H15@5070.94,4936.53
  MidLayer4 (0.5 oz) w5: v1(2230,3680) 2305,3755 2510,3755 2899.23,4144.23 2914.23,4144.23 2931.72,4161.72 2931.72,4176.72 3235,4480 3545,4480 3565,4500 3935,4500 3955,4520 3980,4520 4000,4500 4505,4500 4705.31,4700.31 4952.83,4700.31 4992.2,4739.69 4992.2,5132.8 4970,5155 4970,5260 4990,5280 5005,5280 5020,5265 5020,5115 5031.57,5103.43 5031.57,4975.91 v1(5051.26,4956.22)
RXCLKC+: JP3.1 R209.2 U3.J15 | length 4164
  TopLayer (1 oz) w12: R209.2@2640,2395 v1(2675,2395) ; U3.J15@5149.69,1283.47 v1(5169.37,1263.78)
  MidLayer1 (0.5 oz) w5: v1(2675,2395) 2700,2370 2930,2370 3360,1940 4265,1940 4305,1900 4926.85,1900 4952.83,1874.02 4952.83,947.17 JP3.1@5090,810 5090,1184.41 v1(5169.37,1263.78)
RXCLKC-: R210.2 U3.J14 | length 4000.2
  TopLayer (1 oz) w12: R210.2@2790,2395 v1(2825,2395) ; U3.J14@5149.69,1322.84 v1(5169.37,1303.15)
  MidLayer1 (0.5 oz) w5: v1(2825,2395) 3005,2395 3160,2240 3240,2240 3260,2220 3260,2165 3290,2135 4125,2135 4340,1920 4946.22,1920 4992.2,1874.02 4992.2,1082.2 4970,1060 4970,970 5055,885 5065,885 5070.94,890.94 5070.94,1234.25 5080.79,1244.09 5110.31,1244.09 v1(5169.37,1303.15)
RXCLKD+: JP4.1 R211.2 U3.J3 | length 3792
  TopLayer (1 oz) w12: U3.J3@5149.69,1755.9 v1(5169.37,1775.59)
  MidLayer2 (0.5 oz) w5: v1(2920,2660) 3040,2540 3040,2080 3420,1700 3690,1700 3710,1680 3730,1680 3750,1700 4050,1700 4070,1680 4090,1680 4110,1700 4465,1700 4527.2,1637.8 4913.46,1637.8 4952.83,1677.17 JP4.1@4952.83,2179.13 ; JP4.1@4970,2180 5110.31,2039.69 5110.31,1834.65 v1(5169.37,1775.59)
RXCLKD-: R212.2 U3.H4 | length 3862.2
  TopLayer (1 oz) w12: U3.H4@5189.06,1716.53 v1(5208.74,1736.22)
  MidLayer2 (0.5 oz) w5: v1(2920,2620) 3020,2520 3020,2070 3420,1670 3630,1670 3650,1690 3670,1690 3690,1670 3990,1670 4010,1690 4030,1690 4050,1670 4445,1670 4510,1605 4725,1605 4731.57,1598.43 4952.83,1598.43 4992.2,1637.8 4992.2,1917.8 4970,1940 4970,2120 4980,2130 4995,2130 5070.94,2054.06 5070.94,1834.65 5149.69,1755.91 5189.05,1755.91 v1(5208.74,1736.22)
RXDA0: pad.TVIA@3785,4220 U1.V19 U2.D8 | length 2963.8
  TopLayer (1 oz) w12: U1.V19@2610,3425 v1(2635,3450) ; v1(4893.78,4641.26) U2.D8@4913.47,4660.94
  MidLayer3 (0.5 oz) w5: v1(2635,3450) 2660,3475 2660,3540 2685,3565 2685,3725 3180,4220 3510,4220 3530,4240 3550,4240 3570,4220 4265,4220 4660,4615 4730,4615 4736.57,4621.57 4874.1,4621.57 v1(4893.78,4641.26)
RXDA1: pad.TVIA@3845,4200 U1.W20 U2.D7 | length 2853.3
  TopLayer (1 oz) w12: U1.W20@2660,3475 v1(2685,3500) ; v1(4893.78,4601.89) U2.D7@4913.47,4621.57
  MidLayer3 (0.5 oz) w5: v1(2685,3500) 2685,3530 2710,3555 2710,3710 3200,4200 3570,4200 3590,4180 3610,4180 3630,4200 4295,4200 4677.2,4582.2 4874.1,4582.2 v1(4893.78,4601.89)
RXDA2: pad.TVIA@3785,4270 U1.U17 U2.D10 | length 3197.9
  TopLayer (1 oz) w12: U1.U17@2560,3325 v1(2585,3350) ; v1(4893.78,4759.37) U2.D10@4913.47,4739.69
  MidLayer3 (0.5 oz) w5: v1(2585,3350) 2610,3375 2610,3730 2772.75,3892.75 2772.75,3917.75 2787.14,3932.14 2812.14,3932.14 3110,4230 3110,4235 3145,4270 3510,4270 3530,4290 3550,4290 3570,4270 4205,4270 4655,4720 4854.41,4720 v1(4893.78,4759.37)
RXDA3: pad.TVIA@3845,4100 U1.V18 U2.D3 | length 2867.8
  TopLayer (1 oz) w12: U1.V18@2610,3375 v1(2635,3400) ; v1(4893.78,4444.41) U2.D3@4913.47,4464.1
  MidLayer3 (0.5 oz) w5: v1(2635,3400) 2660,3425 2750,3425 2835,3510 2835,3675 3260,4100 3570,4100 3590,4080 3610,4080 3630,4100 4435,4100 4759.73,4424.73 4874.1,4424.73 v1(4893.78,4444.41)
RXDA4: pad.TVIA@3785,4170 U1.W19 U2.D6 | length 2863.6
  TopLayer (1 oz) w12: U1.W19@2660,3425 v1(2685,3450) ; v1(4893.78,4562.52) U2.D6@4913.47,4582.2
  MidLayer3 (0.5 oz) w5: v1(2685,3450) 2710,3475 2710,3505 2735,3530 2735,3695 3210,4170 3510,4170 3530,4190 3550,4190 3570,4170 4335,4170 4707.84,4542.84 4874.1,4542.84 v1(4893.78,4562.52)
RXDA5: pad.TVIA@3845,4150 U1.Y20 U2.D5 | length 2753.1
  TopLayer (1 oz) w12: U1.Y20@2710,3475 v1(2735,3500) ; v1(4893.78,4523.15) U2.D5@4913.47,4542.84
  MidLayer3 (0.5 oz) w5: v1(2735,3500) 2760,3525 2760,3680 3230,4150 3570,4150 3590,4130 3610,4130 3630,4150 4405,4150 4758.47,4503.47 4874.1,4503.47 v1(4893.78,4523.15)
RXDA6: pad.TVIA@3785,4120 U1.Y19 U2.C4 | length 2740.6
  TopLayer (1 oz) w12: U1.Y19@2710,3425 v1(2735,3450) ; v1(4854.41,4483.78) U2.C4@4874.1,4503.47
  MidLayer3 (0.5 oz) w5: v1(2735,3450) 2785,3500 2785,3665 3240,4120 3510,4120 3530,4140 3550,4140 3570,4120 4085,4120 4105,4140 4135,4140 4155,4120 4415,4120 4759.1,4464.1 4834.73,4464.1 v1(4854.41,4483.78)
RXDA7: 
RXDA7: pad.TVIA@3785,4070 U1.V17 U2.E4 | length 2969
  TopLayer (1 oz) w12: U1.V17@2610,3325 v1(2635,3350) ; v1(4933.15,4483.78) U2.E4@4952.84,4503.47
  MidLayer3 (0.5 oz) w5: v1(2635,3350) 2685,3400 2765,3400 2885,3520 2885,3685 3270,4070 4590,4070 4913.47,4393.47 4913.47,4464.1 v1(4933.15,4483.78)
RXDB0: pad.TVIA@3665,4570 U1.J18 U2.C12 | length 3719.7
  TopLayer (1 oz) w12: v1(2135,3400) U1.J18@2160,3375 ; v1(4854.41,4838.11) U2.C12@4874.1,4818.43
  MidLayer4 (0.5 oz) w5: v1(2135,3400) 2110,3425 2080,3425 2060,3445 2060,3640 2090,3670 2090,3700 2205,3815 2360,3815 2441.7,3896.7 2441.7,3916.7 2458.94,3933.94 2478.94,3933.94 2685,4140 2700,4140 2745,4185 2745,4200 2785,4240 2785,4265 2897.48,4377.48 2912.48,4377.48 3105,4570 3860,4570 3880,4590 3925,4590 3937.93,4577.07 3940.86,4580 3979.14,4580 3989.14,4570 4415,4570 4670,4825 4725,4825 4731.57,4818.43 4834.72,4818.43 v1(4854.41,4838.11)
RXDB1: pad.TVIA@3725,4600 U1.G20 U2.C13 | length 3674.7
  TopLayer (1 oz) w12: v1(2035,3500) U1.G20@2060,3475 ; v1(4854.41,4877.48) U2.C13@4874.1,4857.8
  MidLayer4 (0.5 oz) w5: v1(2035,3500) 2035,3555 2020,3570 2020,3590 2040,3610 2040,3690 2185,3835 2315,3835 2440.81,3960.81 2440.81,3985.81 2460,4005 2485,4005 2630,4150 2630,4180 2645,4195 2665,4195 2675,4205 2675,4230 2684.35,4239.35 2719.35,4239.35 3080,4600 3150,4600 3170,4620 3265,4620 3285,4600 3475,4600 3495,4620 3535,4620 3555,4600 3925,4600 3950,4625 3975,4625 4000,4600 4375,4600 4632.8,4857.8 4834.72,4857.8 v1(4854.41,4877.48)
RXDB2: pad.TVIA@3665,4470 U1.J20 U2.C8 | length 3388.8
  TopLayer (1 oz) w12: v1(2135,3500) U1.J20@2160,3475 ; v1(4854.41,4641.26) U2.C8@4874.1,4660.94
  MidLayer4 (0.5 oz) w5: v1(2135,3500) 2135,3515 2100,3550 2100,3605 2150,3655 2245,3655 2325,3735 2575,3735 2796.65,3956.65 2806.65,3956.65 2816.67,3966.67 2816.67,3976.67 3300,4460 3610,4460 3620,4470 3870,4470 3890,4490 3935.86,4490 3945.86,4480 3979.14,4480 3989.14,4470 4515,4470 4660,4615 4725,4615 4731.57,4621.57 4834.73,4621.57 v1(4854.41,4641.26)
RXDB3: pad.TVIA@3725,4400 U1.K17 U2.C5 | length 3278.8
  TopLayer (1 oz) w12: U1.K17@2210,3325 v1(2235,3350) ; v1(4854.41,4523.15) U2.C5@4874.1,4542.84
  MidLayer4 (0.5 oz) w5: v1(2235,3350) 2260,3375 2260,3425 2285,3450 2285,3560 2400,3675 2635,3675 3360,4400 3815,4400 3835,4380 3985,4380 4005,4400 4655,4400 4758.47,4503.47 4834.73,4503.47 v1(4854.41,4523.15)
RXDB4: pad.TVIA@3665,4620 U1.K18 U2.C14 | length 4069.6
  TopLayer (1 oz) w12: v1(2185,3400) U1.K18@2210,3375 ; v1(4854.41,4916.85) U2.C14@4874.1,4897.16
  MidLayer4 (0.5 oz) w5: v1(2185,3400) 2160,3375 2060,3375 2010,3425 2010,3540 2000,3550 2000,3670 2010,3680 2010,3700 2165,3855 2270,3855 2505.68,4090.68 2515.68,4090.68 2540,4115 2540,4145 2530,4155 2530,4315 2555,4340 2650,4340 2740,4430 2845,4430 3055,4640 3560,4640 3580,4620 3850,4620 3875,4645 3975,4645 4000,4620 4355,4620 4632.17,4897.17 4834.72,4897.17 v1(4854.41,4916.85)
RXDB5: pad.TVIA@3725,4550 U1.J19 U2.C11 | length 3573.3
  TopLayer (1 oz) w12: v1(2135,3450) U1.J19@2160,3425 ; v1(4854.41,4798.74) U2.C11@4874.1,4779.06
  MidLayer4 (0.5 oz) w5: v1(2135,3450) 2110,3475 2110,3510 2080,3540 2080,3625 2115,3660 2115,3685 2225,3795 2425,3795 2730.43,4100.43 2740.43,4100.43 2769.28,4129.28 2769.28,4139.28 2785,4155 2785,4180 3155,4550 3925,4550 3945,4570 3975,4570 3995,4550 4446.89,4550 4675.94,4779.06 4834.72,4779.06 v1(4854.41,4798.74)
RXDB5: 
RXDB6: pad.TVIA@3665,4370 U1.L17 U2.B4 | length 3179
  TopLayer (1 oz) w12: U1.L17@2260,3325 v1(2285,3350) ; v1(4815.04,4483.78) U2.B4@4834.73,4503.47
  MidLayer4 (0.5 oz) w5: v1(2285,3350) 2310,3375 2310,3505 2385,3580 2385,3620 2420,3655 2655,3655 3370,4370 3755,4370 3775,4390 3795,4390 3815,4370 4665,4370 4759.1,4464.1 4795.35,4464.1 v1(4815.04,4483.78)
RXDB7: pad.TVIA@3665,4420 U1.K19 U2.C6 | length 3358.1
  TopLayer (1 oz) w12: v1(2185,3450) U1.K19@2210,3425 ; v1(4854.41,4562.52) U2.C6@4874.1,4582.2
  MidLayer4 (0.5 oz) w5: v1(2185,3450) 2210,3475 2210,3540 2175,3575 2175,3600 2190,3615 2285,3615 2365,3695 2615,3695 3136.39,4216.39 3151.39,4216.39 3168.31,4233.31 3168.31,4248.31 3340,4420 3755,4420 3775,4440 3795,4440 3815,4420 3870,4420 3890,4400 3920,4400 3940,4420 4585,4420 4707.84,4542.84 4834.73,4542.84 v1(4854.41,4562.52)
RXDC0: pad.TVIA@3660,1720 U1.P2 U3.T4 | length 2927.7
  TopLayer (1 oz) w12: U1.P2@2410,2575 v1(2435,2550) ; v1(4854.41,1736.22) U3.T4@4874.1,1716.53
  MidLayer1 (0.5 oz) w5: v1(2435,2550) 2455,2530 2455,2430 2590,2295 2915,2295 3490,1720 3750,1720 3770,1740 3790,1740 3810,1720 3990,1720 4010,1740 4030,1740 4050,1720 4515,1720 4518.46,1716.54 4834.72,1716.54 v1(4854.41,1736.22)
RXDC1: pad.TVIA@3720,1700 U1.P1 U3.R5 | length 2941.3
  TopLayer (1 oz) w12: U1.P1@2410,2525 v1(2435,2500) ; v1(4893.78,1696.85) U3.R5@4913.47,1677.16
  MidLayer1 (0.5 oz) w5: v1(2435,2500) 2435,2380 2545,2270 2910,2270 3480,1700 4050,1700 4070,1680 4720,1680 4722.83,1677.17 4874.09,1677.17 v1(4893.78,1696.85)
RXDC2: pad.TVIA@3660,1520 U1.K1 U3.R12 | length 3459.3
  TopLayer (1 oz) w12: v1(2185,2500) U1.K1@2210,2525 ; v1(4893.78,1381.89) U3.R12@4913.47,1401.57
  MidLayer1 (0.5 oz) w5: v1(2185,2500) 2185,2295 2380,2100 2380,2035 2455,1960 2805,1960 2900,1865 3075,1865 3420,1520 3485,1520 3505,1540 3525,1540 3545,1520 3750,1520 3770,1540 3790,1540 3810,1520 3870,1520 3890,1540 3910,1540 3930,1520 4385,1520 4542.8,1362.2 4874.1,1362.2 v1(4893.78,1381.89)
RXDC3: pad.TVIA@3660,1570 U1.L1 U3.R10 | length 3286.7
  TopLayer (1 oz) w12: U1.L1@2260,2525 v1(2285,2500) ; v1(4893.78,1460.63) U3.R10@4913.47,1480.31
  MidLayer1 (0.5 oz) w5: v1(2285,2500) 2285,2270 2500,2055 2785,2055 2900,1940 3060,1940 3430,1570 3750,1570 3770,1590 3790,1590 3810,1570 3990,1570 4010,1590 4030,1590 4050,1570 4425,1570 4554.06,1440.94 4874.1,1440.94 v1(4893.78,1460.63)
RXDC4: pad.TVIA@3660,1620 U1.M1 U3.R8 | length 3170.2
  TopLayer (1 oz) w12: U1.M1@2310,2525 v1(2335,2500) ; v1(4893.78,1578.74) U3.R8@4913.47,1559.06
  MidLayer1 (0.5 oz) w5: v1(2335,2500) 2335,2300 2490,2145 2945,2145 3470,1620 3750,1620 3770,1640 3790,1640 3810,1620 3990,1620 4010,1640 4030,1640 4050,1620 4465,1620 4525.94,1559.06 4874.09,1559.06 v1(4893.78,1578.74)
RXDC5: pad.TVIA@3720,1650 U1.M2 U3.R7 | length 3183.4
  TopLayer (1 oz) w12: U1.M2@2310,2575 v1(2335,2550) ; v1(4893.78,1618.11) U3.R7@4913.47,1598.43
  MidLayer1 (0.5 oz) w5: v1(2335,2550) 2360,2525 2360,2310 2455,2215 2905,2215 3470,1650 3810,1650 3830,1630 3850,1630 3870,1650 4050,1650 4070,1630 4090,1630 4110,1650 4480,1650 4525,1605 4725,1605 4731.57,1598.43 4874.09,1598.43 v1(4893.78,1618.11)
RXDC6: pad.TVIA@3660,1470 U1.F1 U3.R14 | length 3635.3
  TopLayer (1 oz) w12: v1(1985,2500) U1.F1@2010,2525 ; v1(4893.78,1303.15) U3.R14@4913.47,1322.84
  MidLayer1 (0.5 oz) w5: v1(1985,2500) 1985,2380 2200,2165 2200,2055 2225,2030 2300,2030 2455,1875 2560,1875 2635,1800 3075,1800 3405,1470 3750,1470 3770,1490 3790,1490 3810,1470 4345,1470 4531.54,1283.46 4874.1,1283.46 v1(4893.78,1303.15)
RXDC7: pad.TVIA@3720,1500 U1.F2 U3.R13 | length 3615.3
  TopLayer (1 oz) w12: v1(1985,2550) U1.F2@2010,2575 ; v1(4893.78,1342.52) U3.R13@4913.47,1362.2
  MidLayer1 (0.5 oz) w5: v1(1985,2550) 2010,2525 2010,2435 2355,2090 2355,2020 2460,1915 2815,1915 2895,1835 3075,1835 3410,1500 3810,1500 3830,1480 3850,1480 3870,1500 3930,1500 3950,1480 3970,1480 3990,1500 4360,1500 4537.17,1322.83 4874.1,1322.83 v1(4893.78,1342.52)
RXDD0: pad.TVIA@3780,1770 U1.Y7 U3.U4 | length 2898.2
  TopLayer (1 oz) w12: U1.Y7@2710,2825 v1(2735,2800) ; v1(4815.04,1736.22) U3.U4@4834.73,1716.53
  MidLayer2 (0.5 oz) w5: v1(2735,2800) 2855,2800 2900,2755 2935,2755 3100,2590 3100,2110 3440,1770 3630,1770 3650,1790 3670,1790 3690,1770 3990,1770 4010,1790 4030,1790 4050,1770 4715,1770 4729.09,1755.91 4795.35,1755.91 v1(4815.04,1736.22)
RXDD1: pad.TVIA@3780,1820 U1.U7 U3.R2 | length 3180.1
  TopLayer (1 oz) w12: U1.U7@2560,2825 v1(2585,2800) ; v1(4893.78,1814.96) U3.R2@4913.47,1795.27
  MidLayer2 (0.5 oz) w5: v1(2585,2800) 2610,2825 2610,2855 2630,2875 2900,2875 3140,2635 3140,2130 3450,1820 3990,1820 4010,1840 4030,1840 4045,1825 4715.35,1825 4725,1834.65 4874.09,1834.65 v1(4893.78,1814.96)
RXDD2: pad.TVIA@3840,1600 U1.U6 U3.T11 | length 3220.7
  TopLayer (1 oz) w12: U1.U6@2560,2775 v1(2585,2750) ; v1(4854.41,1421.26) U3.T11@4874.1,1440.94
  MidLayer2 (0.5 oz) w5: v1(2585,2750) 2610,2725 2610,2695 2630,2675 2660,2675 2685,2650 2785,2650 2950,2485 2950,1995 2980,1965 3005,1965 3370,1600 3690,1600 3710,1580 3730,1580 3750,1600 4050,1600 4070,1580 4090,1580 4110,1600 4365,1600 4524.06,1440.94 4834.72,1440.94 v1(4854.41,1421.26)
RXDD3: pad.TVIA@3780,1620 U1.V6 U3.T10 | length 3133.2
  TopLayer (1 oz) w12: U1.V6@2610.75,2774.96 v1(2635.71,2750) ; v1(4854.41,1460.63) U3.T10@4874.1,1480.31
  MidLayer2 (0.5 oz) w5: v1(2635.71,2750) 2660.71,2725 2690,2725 2710,2705 2710,2695 2730,2675 2800,2675 2980,2495 2980,2050 3220,1810 3220,1780 3380,1620 3630,1620 3650,1640 3670,1640 3690,1620 3990,1620 4010,1640 4030,1640 4050,1620 4395,1620 4515,1500 4815.04,1500 v1(4854.41,1460.63)
RXDD4: pad.TVIA@3840,1650 U1.W6 U3.T9 | length 3047.1
  TopLayer (1 oz) w12: U1.W6@2660,2775 v1(2685,2750) ; v1(4854.41,1539.37) U3.T9@4874.1,1519.69
  MidLayer2 (0.5 oz) w5: v1(2685,2750) 2710,2725 2785,2725 3000,2510 3000,2060 3410,1650 3690,1650 3710,1630 3730,1630 3750,1650 4050,1650 4070,1630 4090,1630 4110,1650 4415,1650 4545.31,1519.69 4834.73,1519.69 v1(4854.41,1539.37)
RXDD5: pad.TVIA@3780,1720 U1.Y6 U3.T6 | length 2937.7
  TopLayer (1 oz) w12: U1.Y6@2710,2775 v1(2735,2750) ; v1(4854.41,1657.48) U3.T6@4874.1,1637.8
  MidLayer2 (0.5 oz) w5: v1(2735,2750) 2800,2750 2870,2680 2930,2680 3060,2550 3060,2090 3430,1720 3630,1720 3650,1740 3670,1740 3690,1720 3990,1720 4010,1740 4030,1740 4050,1720 4490,1720 4532.83,1677.17 4834.72,1677.17 v1(4854.41,1657.48)
RXDD6: pad.TVIA@3780,1570 U1.V4 U3.T12 | length 3154
  TopLayer (1 oz) w12: U1.V4@2610,2675 v1(2635,2650) ; v1(4854.41,1381.89) U3.T12@4874.1,1401.57
  MidLayer2 (0.5 oz) w5: v1(2635,2650) 2660,2625 2770,2625 2920,2475 2920,1950 2930,1940 3000,1940 3370,1570 3630,1570 3650,1590 3670,1590 3690,1570 3990,1570 4010,1590 4030,1590 4050,1570 4345,1570 4520,1395 4725,1395 4731.57,1401.57 4834.72,1401.57 v1(4854.41,1381.89)